# Altium PCB Plate_D.PcbDoc
Units mm, origin at the board's own origin, x right, y up, seen from the top; angles counter-clockwise.
Board outline 100 x 100 mm, 2 copper layers (Top Layer, Bottom Layer), stack 0.97 mm thick; 6 components, 2 nets, 10 pads, 0 vias.
Unrouted connection lines stored in the file: 2.
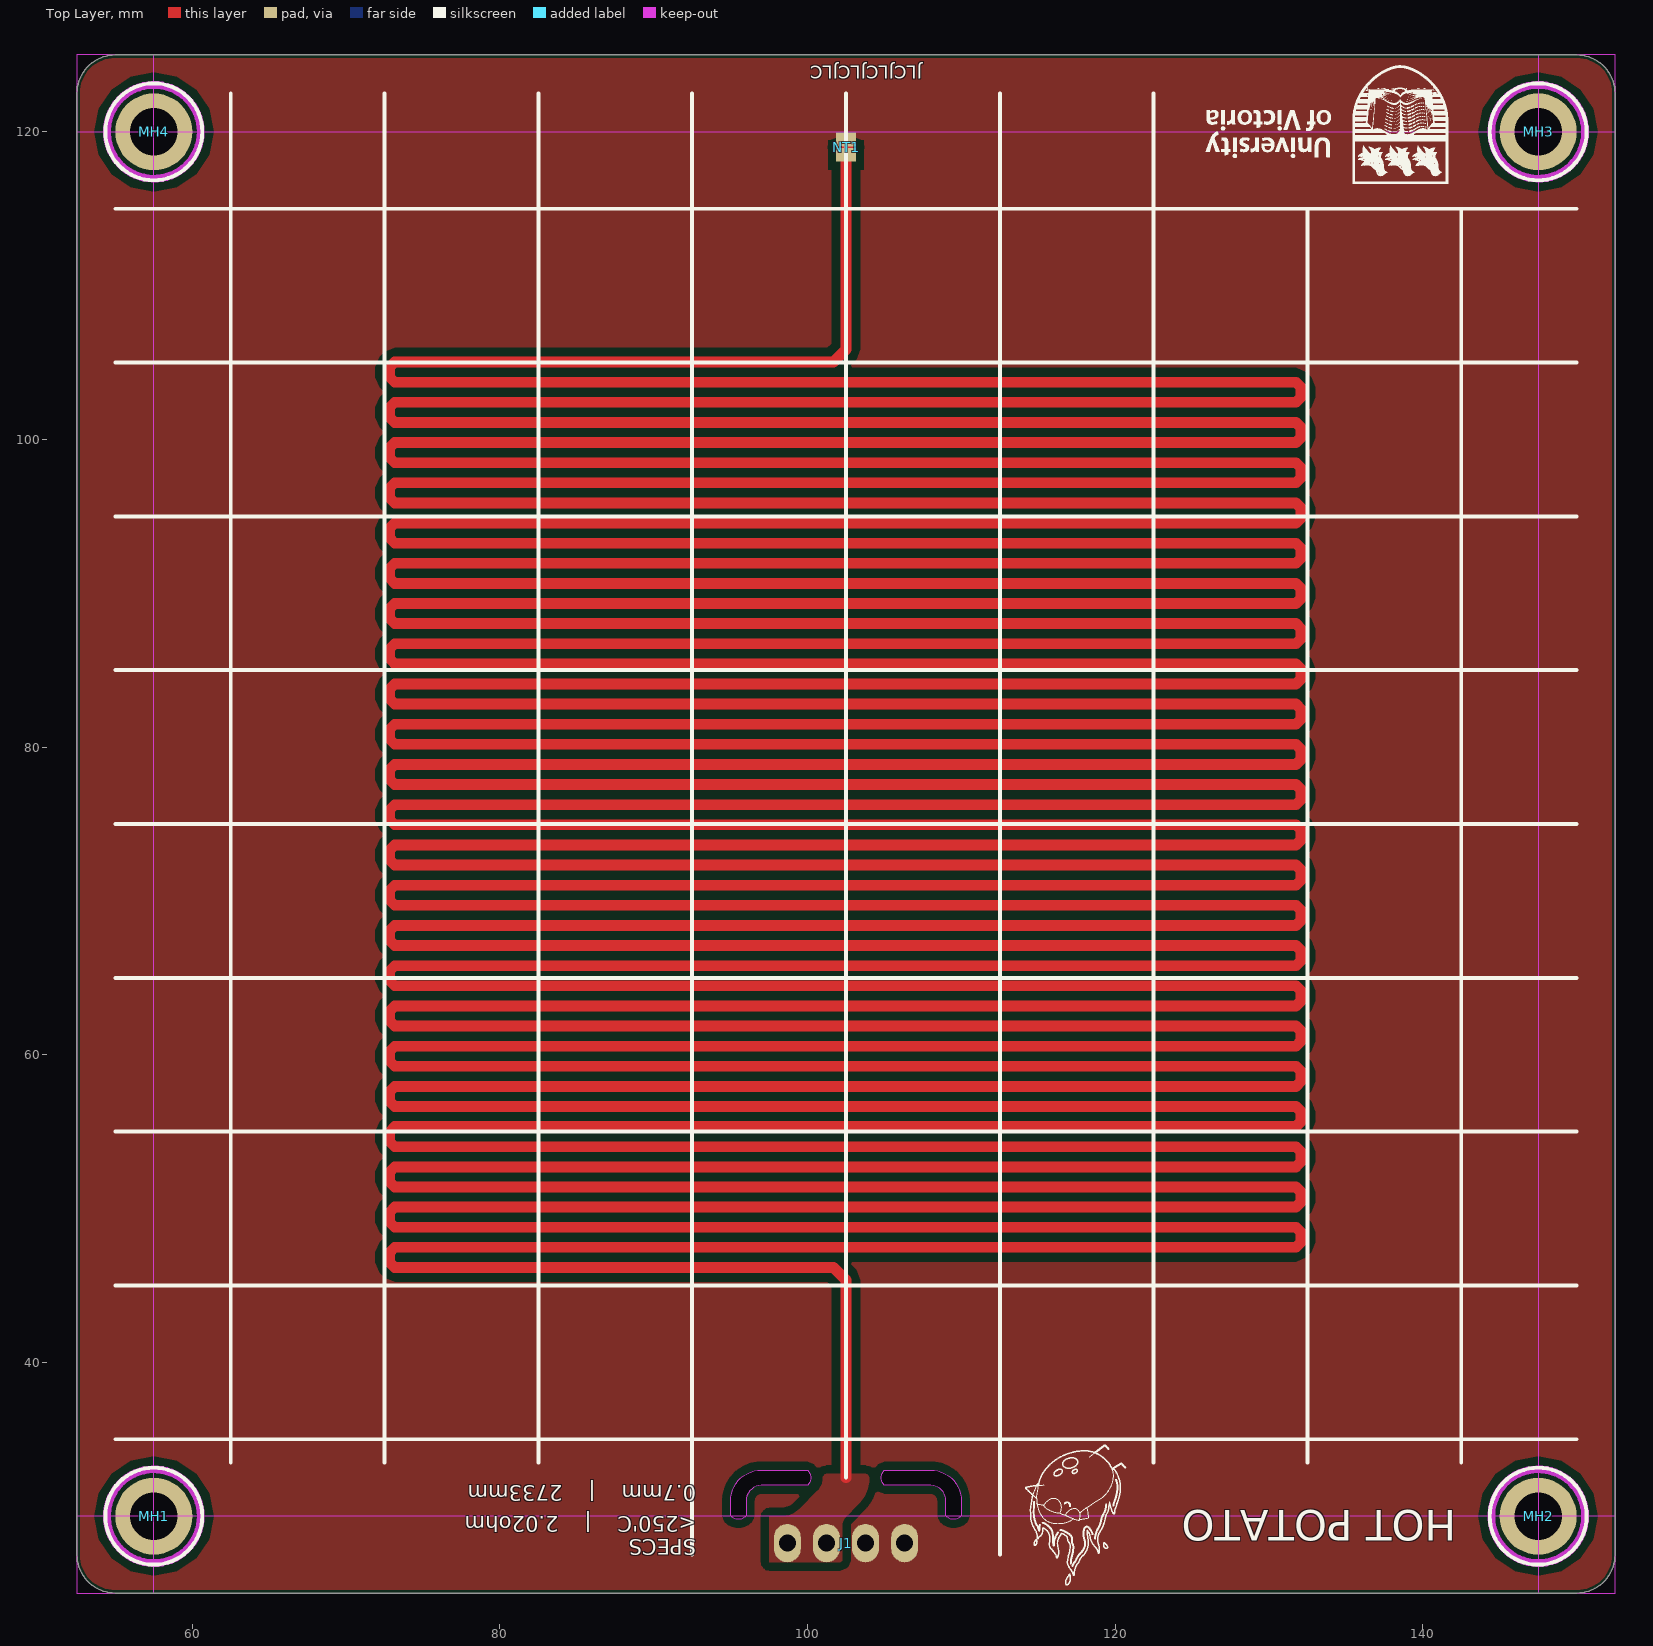
[diagram p0: Top Layer view]
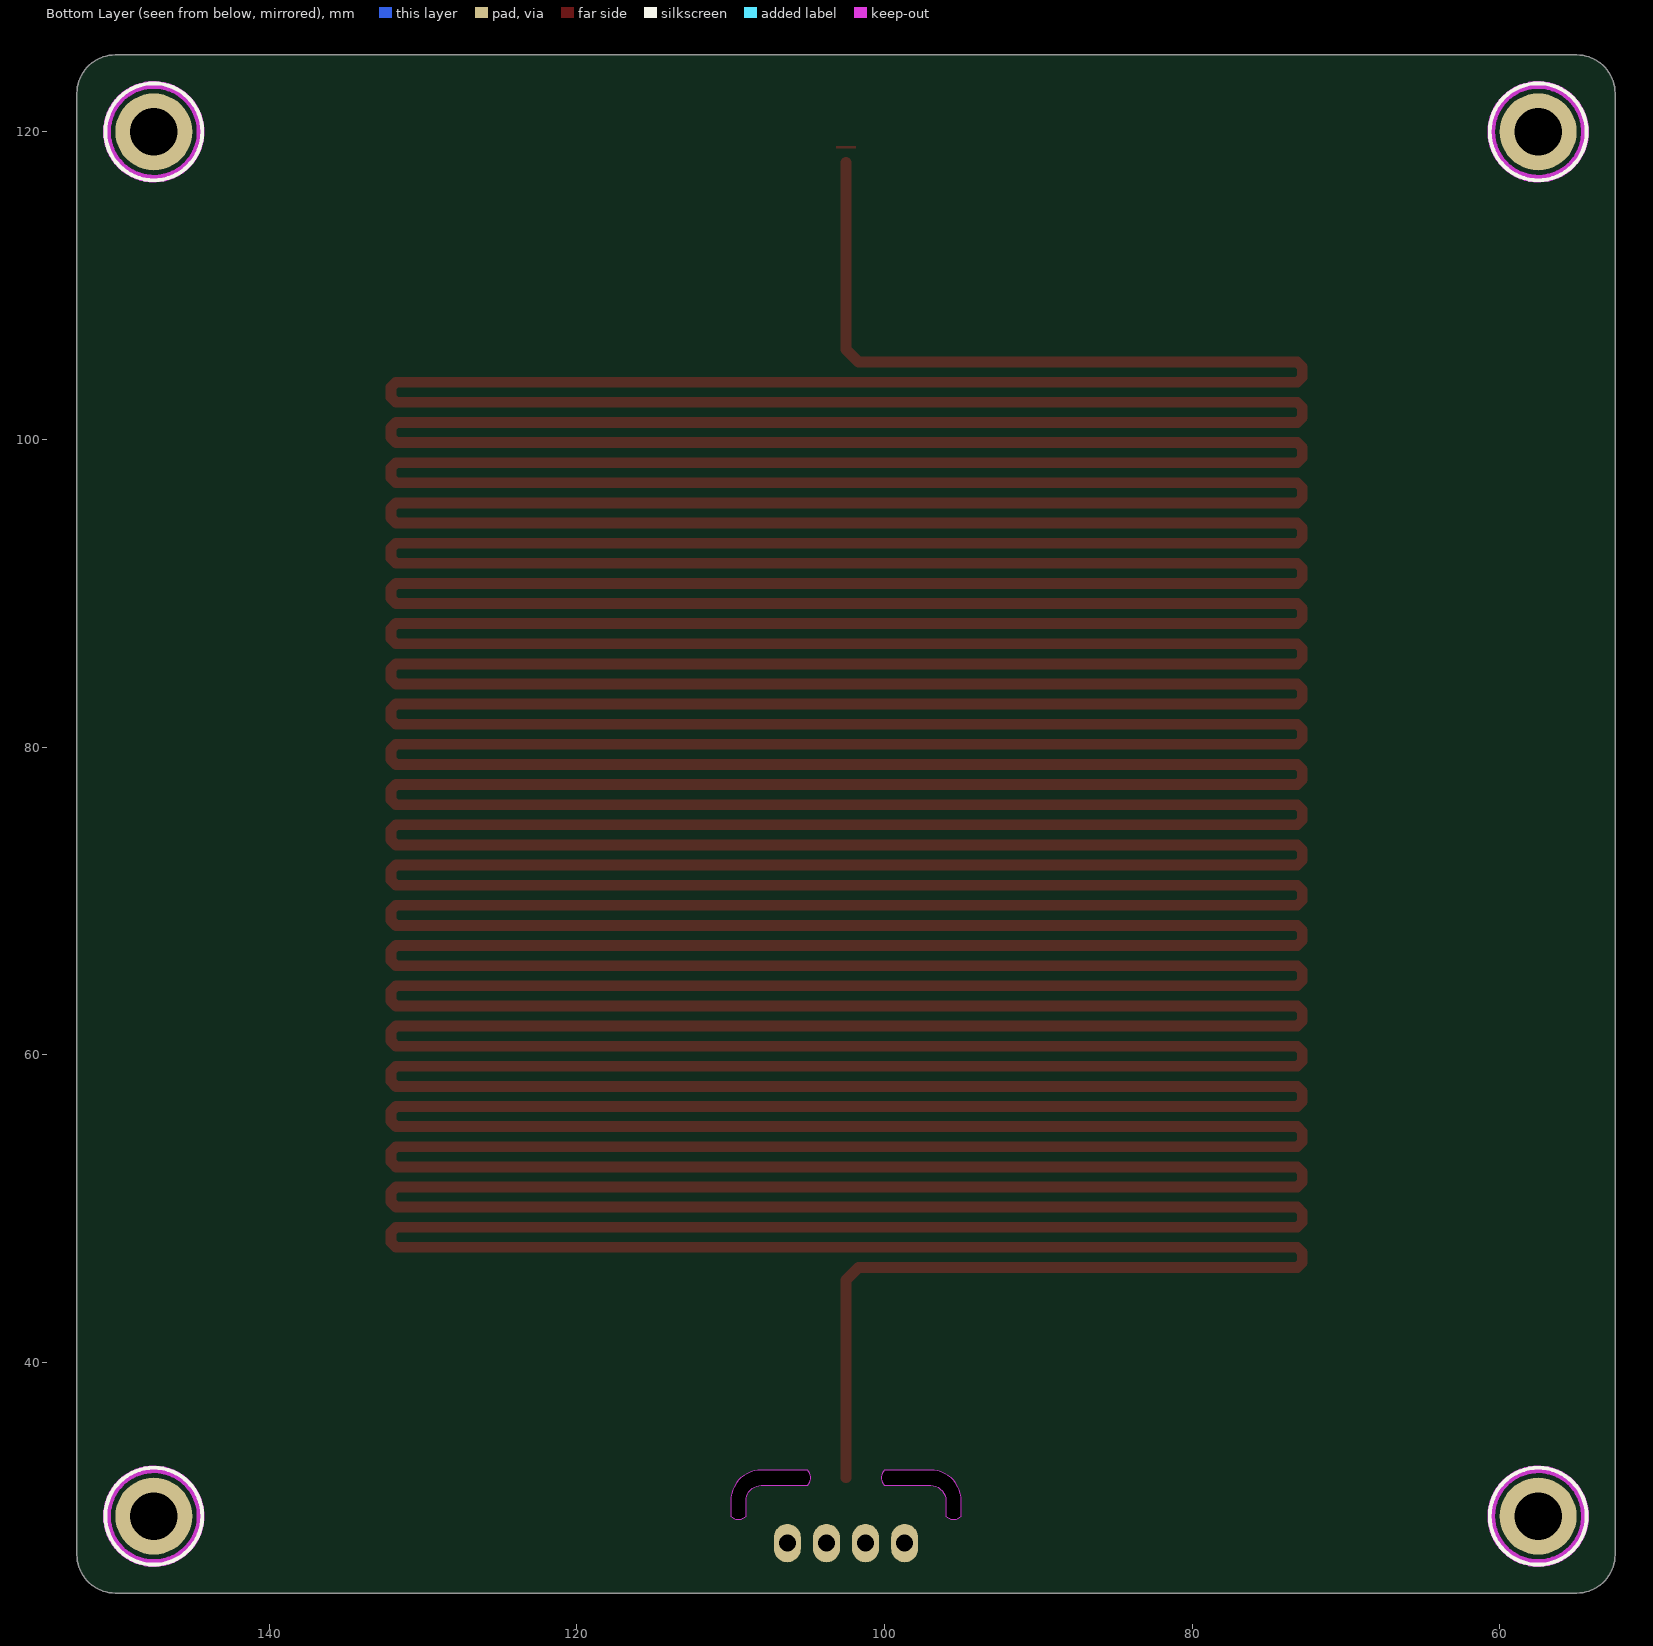
[diagram p1: Bottom Layer view, seen from below]

## Layer stack, top to bottom
Top Solder: solder mask 0.0127, Solder Resist, Dk 3.8
Top Layer: signal copper 0.035
Dielectric: core 0.9, FR-4, Dk 4.5
Bottom Layer: signal copper 0.035
Bottom Solder: solder mask 0.0127, Solder Resist, Dk 3.8

## Board outline
52.5,27.5 ccw(c55,27.5) 55,25 150,25 ccw(c150,27.5) 152.5,27.5 152.5,122.5 ccw(c150,122.5) 150,125 55,125 ccw(c55,122.5) 52.5,122.5
cut-out: 95,30 95,31 cw(c97,31) 97,33 100,33 cw(c99.5,32.5) 100,32 97,32 ccw(c97,31) 96,31 96,30 cw(c95.5,30.5)
cut-out: 105,32 cw(c105.5,32.5) 105,33 108,33 cw(c108,31) 110,31 110,30 cw(c109.5,30.5) 109,30 109,31 ccw(c108,31) 108,32

## Design rules (kind name [scope] priority, off if disabled: settings)
BoardOutlineClearance [All] p1: gap=0.2 ignorepadtopadclearanceinfootprint=FALSE
Clearance "Polygon Pour Clearance" [InPolygon] p1: gap=0.508 ignorepadtopadclearanceinfootprint=FALSE
Clearance [All] p2: gap=0.127 ignorepadtopadclearanceinfootprint=FALSE except(0.25: Arc-Hole Track-Hole SMDPad-Hole THPad-Hole Via-Hole Fill-Hole Poly-Hole Region-Hole Text-Hole)
ComponentClearance [All] p1: gap=0.127 collisioncheckmode=3 verticalgap=0.127 showdistances=TRUE
DiffPairsRouting [All] p1: maxlimit=0.254 minlimit=0.127 mostfreqgap=0.127 toplayer_minwidth=0.127 toplayer_maxwidth=25.4 toplayer_prefwidth=0.127 bottomlayer_minwidth=0.127 bottomlayer_maxwidth=25.4 bottomlayer_prefwidth=0.127 maxuncoupledlength=12.7
Height [All] p1: minheight=0 maxheight=1816.048 prefheight=12.7
HoleSize [All] p1: absolutevalues=TRUE maxlimit=6.3 minlimit=0.3 maxpercent=80.000 minpercent=20.000
HoleToHoleClearance [All] p1: gap=0.25 allowstackedmicrovias=FALSE
MinimumAnnularRing [All] p1: minimumring=0.076
MinimumSolderMaskSliver [All] p1: minsoldermaskwidth=0
PlaneClearance [All] p1: clearance=0.127
PlaneConnect PlaneConnectPowerPads [InPadClass('PowerPads')] p1: planeconnectstyle=Direct reliefexpansion=0.508 reliefentries=4 reliefconductorwidth=0.254 reliefairgap=0.254
PlaneConnect [All] p2: pad.planeconnectstyle=Relief pad.reliefexpansion=0.3 pad.reliefentries=4 pad.reliefconductorwidth=0.127 pad.reliefairgap=0.127 via.planeconnectstyle=Direct via.reliefexpansion=0.3 via.reliefentries=4 via.reliefconductorwidth=0.127 via.reliefairgap=0.127
PolygonConnect PolygonConnectPowerPads [All vs (InPadClass('PowerPads'))] p1: connectstyle=Direct reliefconductorwidth=0.254 reliefentries=4 polygonreliefangle="90 Angle" airgapwidth=0.254
PolygonConnect [All] p2: thpad.connectstyle=Relief thpad.reliefconductorwidth=0.127 thpad.reliefentries=4 thpad.polygonreliefangle="90 Angle" thpad.airgapwidth=0.127 smdpad.connectstyle=Relief smdpad.reliefconductorwidth=0.127 smdpad.reliefentries=4 smdpad.polygonreliefangle="90 Angle" smdpad.airgapwidth=0.127 via.connectstyle=Direct via.reliefconductorwidth=0.127 via.reliefentries=4 via.polygonreliefangle="90 Angle" via.airgapwidth=0.127
RoutingVias [All] p1: holewidth=0.3 width=0.6 viastyle="Through Hole" minholewidth=0.3 minwidth=0.6 maxholewidth=0.6 maxwidth=6.6
SilkToSilkClearance [All] p1: silktosilkclearance=0
SilkToSolderMaskClearance [IsPad] p1: minsilkscreentomaskgap=0.127 clearancetoexposedcopper=TRUE
SolderMaskExpansion [All] p1: expansion=0.075 istentingtop=FALSE
Width [All] p1: maxlimit=25.4 minlimit=0.127 preferedwidth=0.127 minimp=50.000000 maximp=50.000000 favimp=50.000000
20 further rules are at their usual default settings.

## Classes and differential pairs
component class plate: J1 MH1 MH2 MH3 MH4

## Components (designator, comment, footprint, x,y, rotation, side; value= is the part's Value field where it differs from the comment)
J1 "282834-4" "TE 282834-4" 102.5,28.25 r180 top
MH1 "3mm" Mount-Hole_3mm 57.5,30 r0 top locked
MH2 "3mm" Mount-Hole_3mm 147.5,30 r0 top locked
MH3 "3mm" Mount-Hole_3mm 147.5,120 r0 top locked
MH4 "3mm" Mount-Hole_3mm 57.5,120 r0 top locked
NT1 "Net Tie" NetTie_50mil 102.5,119 r270 top net-tie

## Footprints (in the part's own frame and the unit in brackets; to place one, negate y for a bottom-side part, rotate by r counter-clockwise, add the part's x,y. Pads: shape width x height; smd on the part's side, far side on the other; paste and mask are expansions set on the pad)
Mount-Hole_3mm [mm]
  round 5 hole 3.1: 1(0,0)
  Keep-Out Layer circle w0.508: c0,0 r3.048
  silkscreen extent -3.15,-3.15 3.15,3.15, body extent -2.25,-2.6 2.25,2.6, height 4.19
NetTie_50mil [mm]
  rect 0.889x1.27 smd mask+0.102: 1(-0.5,0) 2(0.5,0)
  Top Layer region: -0.075,0.635 0.075,0.635 0.075,-0.635 -0.075,-0.635
"TE 282834-4" [mm]
  oval 1.75x2.5 hole 1.1: 1(-3.81,0) 2(-1.27,0) 3(1.27,0) 4(3.81,0)
  body extent -5.31,-3.25 5.31,3.25, height 10

## Part data
J1: "TERM BLK 4P SIDE ENT 2.54MM PCB", Color=Green, Current=10A, Manufacturer="TE Connectivity AMP Connectors", Supplier Part Number 1=A98335-ND, Voltage=150V, ComponentLink1Description=Datasheet, ComponentLink1URL=https://www.te.com/commerce/DocumentDelivery/DDEController?Action=srchrtrv&DocNm=282834&DocType=Customer+Drawing&DocLang=English, ComponentLink2Description="DigiKey Link", ComponentLink2URL=http://digikey.com/product-detail/en/te-connectivity-amp-connectors/282834-4/A98335-ND/1153265, LastUpdated="2020-01-15 4:16:05 AM", Lifecycle Status=Active, Mating Orientation="Horizontal with Board", Minimum Order=1, Mounting Type="Through Hole", Number of Levels=1, Packaging=Bulk, Part Number=282834-4, Part Status=Active, Pitch="0.100\" (2.54mm)", Positions Per Level=4, Price=2.68, Series=Buchanan, Supplier 1=DigiKey, Wire Gauge="16-30 AWG", Wire Termination="Screw - Rising Cage Clamp"
MH1 MH2 MH3 MH4: library part Mount_Hole_3mm, "Mounting Hole 3mm plated"
NT1: library part NetTie_50mil, "Net Tie with 50mil trace"

## Nets (pads, with @x,y where several pads share a name; then routed paths per layer and width w, separated by ;. In a path a pad name is that pad's centre, name@x,y a point inside that pad or via, vN(x,y) a via of type N, cw(c..) or ccw(c..) an arc to the next point about the centre after c; other vN are vias at no path point)
PWR: J1.3 J1.4 NT1.2 | length 2733.4
  Top Layer w0.7: 102.5,32.5 102.5,45 102.5,45.35 101.68,46.17 73.167,46.17 72.84,46.497 72.84,47.151 73.167,47.478 131.759,47.478 132.086,47.805 132.086,48.459 131.759,48.786 73.167,48.786 72.84,49.113 72.84,49.767 73.167,50.094 131.759,50.094 132.086,50.421 132.086,51.075 131.759,51.402 73.167,51.402 72.84,51.729 72.84,52.383 73.167,52.71 131.759,52.71 132.086,53.037 132.086,53.691 131.759,54.018 73.167,54.018 72.84,54.345 72.84,54.999 73.167,55.326 131.759,55.326 132.086,55.653 132.086,56.307 131.759,56.634 73.167,56.634 72.84,56.961 72.84,57.615 73.167,57.942 131.759,57.942 132.086,58.269 132.086,58.923 131.759,59.25 73.167,59.25 72.84,59.577 72.84,60.231 73.167,60.558 131.759,60.558 132.086,60.885 132.086,61.539 131.759,61.866 73.167,61.866 72.84,62.193 72.84,62.847 73.167,63.174 131.759,63.174 132.086,63.501 132.086,64.155 131.759,64.482 73.167,64.482 72.84,64.809 72.84,65.463 73.167,65.79 131.759,65.79 132.086,66.117 132.086,66.771 131.759,67.098 73.167,67.098 72.84,67.425 72.84,68.079 73.167,68.406 131.759,68.406 132.086,68.733 132.086,69.387 131.759,69.714 73.167,69.714 72.84,70.041 72.84,70.695 73.167,71.022 131.759,71.022 132.086,71.349 132.086,72.003 131.759,72.33 73.167,72.33 72.84,72.657 72.84,73.311 73.167,73.638 131.759,73.638 132.086,73.965 132.086,74.619 131.759,74.946 73.167,74.946 72.84,75.273 72.84,75.927 73.167,76.254 131.759,76.254 132.086,76.581 132.086,77.235 131.759,77.562 73.167,77.562 72.84,77.889 72.84,78.543 73.167,78.87 131.759,78.87 132.086,79.197 132.086,79.851 131.759,80.178 73.167,80.178 72.84,80.505 72.84,81.159 73.167,81.486 131.759,81.486 132.086,81.813 132.086,82.467 131.759,82.794 73.167,82.794 72.84,83.121 72.84,83.775 73.167,84.102 131.759,84.102 132.086,84.429 132.086,85.083 131.759,85.41 73.167,85.41 72.84,85.737 72.84,86.391 73.167,86.718 131.759,86.718 132.086,87.045 132.086,87.699 131.759,88.026 73.167,88.026 72.84,88.353 72.84,89.007 73.167,89.334 131.759,89.334 132.086,89.661 132.086,90.315 131.759,90.642 73.167,90.642 72.84,90.969 72.84,91.623 73.167,91.95 131.759,91.95 132.086,92.277 132.086,92.931 131.759,93.258 73.167,93.258 72.84,93.585 72.84,94.239 73.167,94.566 131.759,94.566 132.086,94.893 132.086,95.547 131.759,95.874 73.167,95.874 72.84,96.201 72.84,96.855 73.167,97.182 131.759,97.182 132.086,97.509 132.086,98.163 131.759,98.49 73.167,98.49 72.84,98.817 72.84,99.471 73.167,99.798 131.759,99.798 132.086,100.125 132.086,100.779 131.759,101.106 73.167,101.106 72.84,101.433 72.84,102.087 73.167,102.414 131.759,102.414 132.086,102.741 132.086,103.395 131.759,103.722 73.167,103.722 72.84,104.049 72.84,104.703 73.167,105.03 101.68,105.03 102.5,105.85 102.5,106.21 102.5,118
RETURN: J1.1 J1.2 NT1.1
pads on no net: MH1.1 MH2.1 MH3.1 MH4.1

## Polygon pours and split planes (outlines as drawn)
RETURN on Top Layer "RETURN_L01_P007" (solid, pour order 7): 52.5,125 152.5,125 152.5,25 52.5,25
PWR on Top Layer "ggg" (solid, pour order 5): 101.25,32.75 103.75,32.75 cw(c103.75,32.5) 104,32.5 cw(c101.497,32.499) 103.266,30.728 102.473,29.936 ccw(c103.013,29.396) 102.25,29.396 102.25,27 97.5,27 97.5,30 98.293,30 ccw(c98.293,31.707) 99.5,30.5 100.646,31.646 ccw(c99.793,32.5) 101,32.5 cw(c101.25,32.5)

## Keep-outs
Top Layer:
  region: 52.5,120 152.5,120 152.5,125 52.5,125
  region: 52.5,25 152.5,25 152.5,30 52.5,30
  region: 147.5,125 147.5,25 152.5,25 152.5,125
  region: 52.5,125 52.5,25 57.5,25 57.5,125

## Silkscreen, mask and mechanical layers (free items; w line width, h text height)
Top Overlay:
  drawing of 192 lines, arcs and shapes, not listed
  text "JLCJLCJLCJLC" at 107.457,124.3 h0.85 r180
  text "0.7mm    |    2733mm" at 92.75,32 h1 r180
  text "HOT POTATO" at 142.164,30.4 h2 r180
  text "SPECS / <250'C    |    2.02ohm" at 92.75,30 h1 r180
Dimensions:
  lines w0.254: 52.5,75 152.5,75 ; 102.5,25 102.5,125 ; 152.5,25 52.5,125 ; 52.5,25 152.5,125 ; 52.5,25 52.5,25 ; 52.5,125 52.5,125 ; 52.5,125 52.5,125 ; 152.5,125 152.5,125
Board:
  lines w0.254: 52.5,27.5 ccw(c55,27.5) 55,25 150,25 ccw(c150,27.5) 152.5,27.5 152.5,122.5 ccw(c150,122.5) 150,125 55,125 ccw(c55,122.5) 52.5,122.5 52.5,27.5 ; 95,30 ccw(c95.5,30.5) 96,30 96,31 cw(c97,31) 97,32 100,32 ccw(c99.5,32.5) 100,33 97,33 ccw(c97,31) 95,31 95,30 ; 105,32 cw(c105.5,32.5) 105,33 108,33 cw(c108,31) 110,31 110,30 cw(c109.5,30.5) 109,30 109,31 ccw(c108,31) 108,32 105,32
Formula:
  text "Setting Trace Length and Width: /  Trace Length: PCB panel -> NET name PWR -> \"Routed Length\" /                Adj: Select Hotplate traces -> Tweak \"Space\" /  Trace Width: Select Base or tale of track -> properties -> \"Width\" /                Adj: Select Hotplate Traces -> *DELETE* -> Change Width -> \"Interactively tune Trace Length:" at 160,122.5 h1.52

## Dimensions
57.5,30 to 57.5,120 on Dimensions
57.5,120 to 147.5,120 on Dimensions
55,105 to 55,115 on Top Overlay
62.5,122.5 to 72.5,122.5 on Top Overlay
57.5,120 to 55,125 on Dimensions
57.5,120 to 52.5,122.5 on Dimensions
52.5,25 to 52.5,125 on Dimensions
52.5,125 to 152.5,125 on Dimensions